# Altium PCB PCB.PcbDoc
Units mil, origin at the board's own origin, x right, y up, seen from the top; angles counter-clockwise.
Board outline 6000 x 4000 mil, 2 copper layers (Top Layer, Bottom Layer); 20 components, 19 nets, 166 pads, 0 vias.
Unrouted connection lines stored in the file: 74.
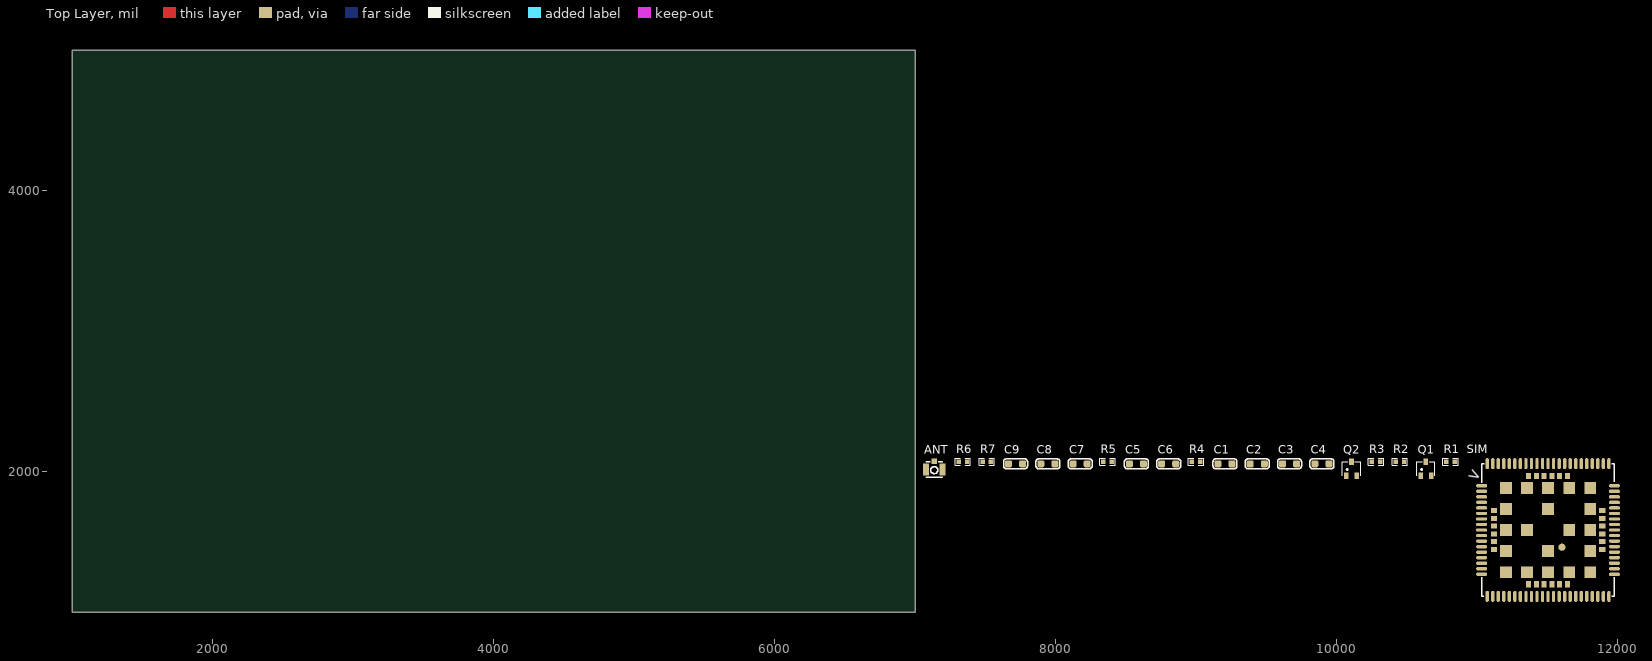
[diagram p0: Top Layer view]
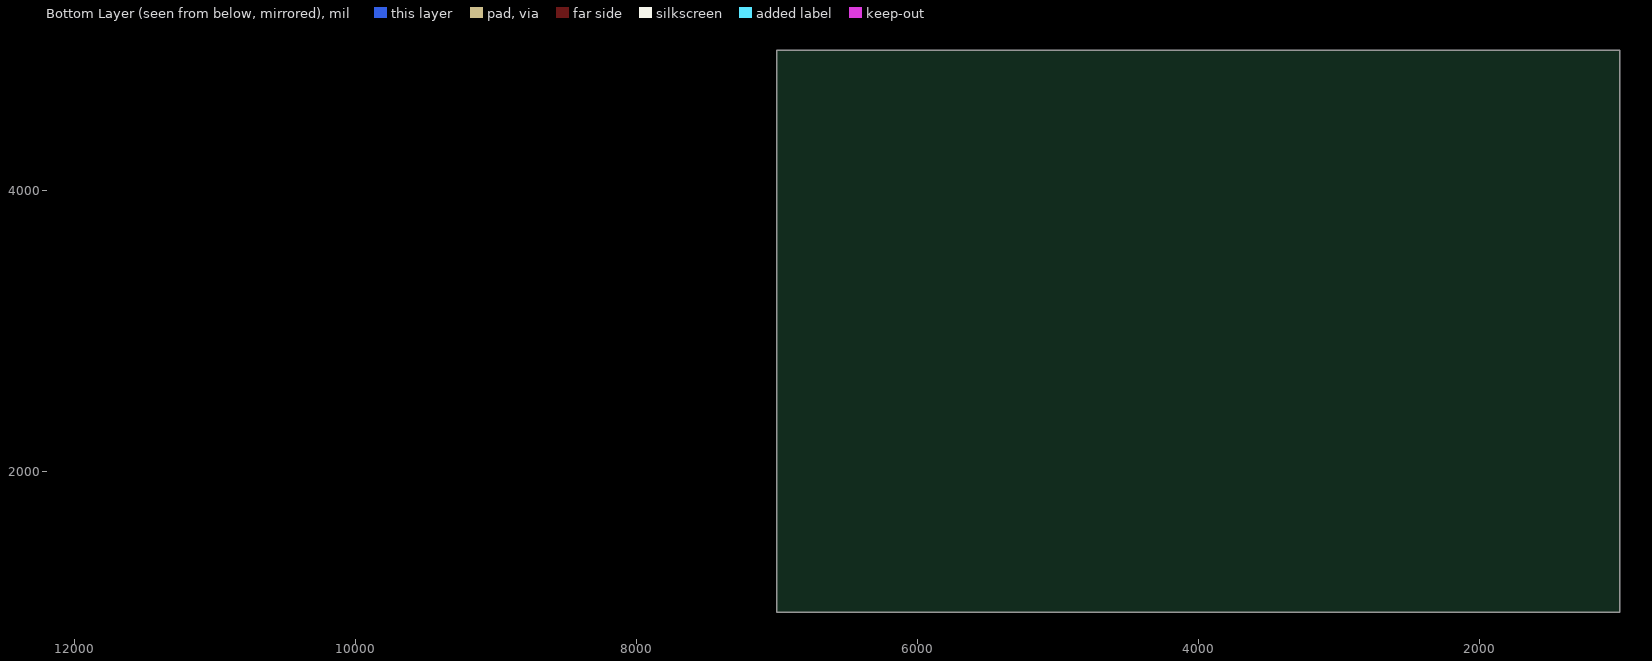
[diagram p1: Bottom Layer view, seen from below]

## Layer stack, top to bottom
Top Solder: solder mask 0.4, Solder Resist, Dk 3.5
Top Layer: signal copper 1.4
Dielectric 1: dielectric 12.6, FR-4, Dk 4.8
Bottom Layer: signal copper 1.4
Bottom Solder: solder mask 0.4, Solder Resist, Dk 3.5

## Board outline
1000,1000 7000,1000 7000,5000 1000,5000

## Design rules (kind name [scope] priority, off if disabled: settings)
Clearance [All] p1: gap=10 ignorepadtopadclearanceinfootprint=FALSE
PolygonConnect [All] p1: connectstyle=Relief reliefconductorwidth=10 reliefentries=4 polygonreliefangle="90 Angle" airgapwidth=10
RoutingVias [All] p1: holewidth=28 width=50 viastyle="Through Hole" minholewidth=28 minwidth=50 maxholewidth=28 maxwidth=50
SolderMaskExpansion [All] p1: expansion=4 istentingtop=FALSE
Width [All] p1: maxlimit=10 minlimit=10 preferedwidth=10
30 further rules are at their usual default settings.

## Components (designator, comment, footprint, x,y, rotation, side; value= is the part's Value field where it differs from the comment)
ANT "ANT" "CONNECTORS RF SMD TYPE IPEX" 7135,2010 r0 top
C1 "10pF" CAP_0805 9205,2055 r0 top
C2 "33pF" CAP_0805 9435,2055 r0 top
C3 "0.1uF" CAP_0805 9665,2055 r0 top
C4 "1uF" CAP_0805 9895,2055 r0 top
C5 "33pF" CAP_0805 8575,2055 r0 top
C6 "100nF" CAP_0805 8805,2055 r0 top
C7 "22pF" CAP_0805 8175,2055 r0 top
C8 "22pF" CAP_0805 7945,2055 r0 top
C9 "22pF" CAP_0805 7715,2055 r0 top
Q1 "2N3904" SOT-23 10635,2020 r0 top value=C9014
Q2 "2N3904" SOT-23 10105,2020 r0 top value=C9014
R1 "4.7k" "RES CHIPS SMD 0603 TYPE 1608" 10810,2070 r0 top
R2 "47k" "RES CHIPS SMD 0603 TYPE 1608" 10450,2070 r0 top
R3 "4.7k" "RES CHIPS SMD 0603 TYPE 1608" 10280,2070 r0 top
R4 "47k" "RES CHIPS SMD 0603 TYPE 1608" 9000,2070 r0 top
R5 "22R" "RES CHIPS SMD 0603 TYPE 1608" 8370,2070 r0 top
R6 "22R" "RES CHIPS SMD 0603 TYPE 1608" 7340,2070 r0 top
R7 "22R" "RES CHIPS SMD 0603 TYPE 1608" 7510,2070 r0 top
SIM "Sim7670G" SIM7670 11505,1580 r0 top

## Footprints (in the part's own frame and the unit in brackets; to place one, negate y for a bottom-side part, rotate by r counter-clockwise, add the part's x,y. Pads: shape width x height; smd on the part's side, far side on the other; paste and mask are expansions set on the pad)
CAP_0805 [mil]
  rrect50% 50x50 smd: 1(-50,0) 2(50,0)
  silkscreen extent -85,-35 85,35, body extent -40,-25 40,25, height 24
"CONNECTORS RF SMD TYPE IPEX" [mm]
  rect 1x1.05 smd: 1(0.024,1.627)
  rect 1.05x2.2 smd: 2(-1.451,0.102) 3(1.499,0.102)
  silkscreen extent -1.45,-1.3 1.47,1.5, body extent -1.45,-1.4 1.55,1.7, height 1.25
"RES CHIPS SMD 0603 TYPE 1608" [mil]
  rect 31.75x34.02 smd: 1(-30,0) 2(29.31,0)
  silkscreen extent -55,-26 54,26, body extent -32,-16 31,16, height 17
SIM7670 [mm]
  oval 2x0.6 smd paste+0.102 mask+0.102: 1(-12.009,8.1) 2(-12.009,7.1) 3(-12.009,6.1) 4(-12.009,5.1) 5(-12.009,4.1) 6(-12.009,3.1) 7(-12.009,2.1) 8(-12.009,1.1) 9(-12.009,0.1) 10(-12.009,-0.9) 11(-12.009,-1.9) 12(-12.009,-2.9) 13(-12.009,-3.9) 14(-12.009,-4.9) 15(-12.009,-5.9) 16(-12.009,-6.9) 17(-12.009,-7.9) 35(11.991,-7.9) 36(11.991,-6.9) 37(11.991,-5.9) 38(11.991,-4.9) 39(11.991,-3.9) 40(11.991,-2.9) 41(11.991,-1.9) 42(11.991,-0.9) 43(11.991,0.1) 44(11.991,1.1) 45(11.991,2.1) 46(11.991,3.1) 47(11.991,4.1) 48(11.991,5.1) 49(11.991,6.1) 50(11.991,7.1) 51(11.991,8.1)
  oval 0.6x2 smd paste+0.102 mask+0.102: 18(-8.009,-11.9) 19(-7.009,-11.9) 20(-6.009,-11.9) 21(-5.009,-11.9) 22(-4.009,-11.9) 23(-3.009,-11.9) 24(-2.009,-11.9) 25(-1.009,-11.9) 26(-0.009,-11.9) 27(0.991,-11.9) 28(1.991,-11.9) 29(2.991,-11.9) 30(3.991,-11.9) 31(4.991,-11.9) 32(5.991,-11.9) 33(6.991,-11.9) 34(7.991,-11.9) 52(7.991,12.1) 53(6.991,12.1) 54(5.991,12.1) 55(4.991,12.1) 56(3.991,12.1) 57(2.991,12.1) 58(1.991,12.1) 59(0.991,12.1) 60(-0.009,12.1) 61(-1.009,12.1) 62(-2.009,12.1) 63(-3.009,12.1) 64(-4.009,12.1) 65(-5.009,12.1) 66(-6.009,12.1) 67(-7.009,12.1) 68(-8.009,12.1) 89(-11.009,-11.9) 90(-10.009,-11.9) 91(-9.009,-11.9) 92(8.991,-11.9) 93(9.991,-11.9) 94(10.991,-11.9) 95(10.991,12.1) 96(9.991,12.1) 97(8.991,12.1) 98(-9.009,12.1) 99(-10.009,12.1) 100(-11.009,12.1)
  rect 2.1x2.1 smd paste+0.102 mask+0.102: 69(-7.609,7.7) 70(-7.609,3.9) 71(-7.609,0.1) 72(-7.609,-3.7) 73(-7.609,-7.5) 74(-3.809,-7.5) 75(-0.009,-7.5) 76(3.791,-7.5) 77(7.591,-7.5) 78(7.591,-3.7) 79(7.591,0.1) 80(7.591,3.9) 81(7.591,7.7) 82(3.791,7.7) 83(-0.009,7.7) 84(-3.809,7.7) 85(-3.809,0.1) 86(-0.009,-3.7) 87(3.791,0.1) 88(-0.009,3.9)
  rect 1.1x0.9 smd paste+0.102 mask+0.102: 101(-9.809,3.6) 102(-9.809,2.2) 103(-9.809,0.8) 104(-9.809,-0.6) 105(-9.809,-2) 106(-9.809,-3.4) 113(9.791,-3.4) 114(9.791,-2) 115(9.791,-0.6) 116(9.791,0.8) 117(9.791,2.2) 118(9.791,3.6)
  rect 0.9x1.1 smd paste+0.102 mask+0.102: 107(-3.509,-9.7) 108(-2.109,-9.7) 109(-0.709,-9.7) 110(0.691,-9.7) 111(2.091,-9.7) 112(3.491,-9.7) 119(3.491,9.9) 120(2.091,9.9) 121(0.691,9.9) 122(-0.709,9.9) 123(-2.109,9.9) 124(-3.509,9.9)
  round 1.3 smd paste+0.102 mask+0.102: ""(2.491,-3)
  silkscreen extent -12.01,-11.9 11.99,12.1
SOT-23 [mm] "SOT 23 _ 1-3-2"
  rect 0.85x1.2 smd: 1(-0.94,-1.245) 2(0.985,-1.25) 3(0.005,1.25)
  silkscreen extent -1.65,-1.27 1.65,1.27, body extent -1.47,-1.33 1.53,1.17, height 1.06

## Part data
ANT: library part "CONNECTORS RF SMD", "SMD RF Connectors / Coaxial Connectors ROHS", BOM_JLCPCB Part Class="Extended Part", BOM_Manufacturer="SHOU HAN(首韩)", BOM_Manufacturer Part="IPEX1-TXZ 142", BOM_Supplier=LCSC, BOM_Supplier Part=C3151745, Contributor=lcsc, link=https://atta.szlcsc.com/upload/public/pdf/source/20220627/A0C2EF411B6F3EC53ED1A4F491E26EB6.pdf, spicePre=U, spiceSymbolName="IPEX1-TXZ 142"
C1 C2 C3 C4 C5 C6 C7 C8 C9: library part CAP104-100nF-50V, "Capacitor", 104=100nF
Q1 Q2: library part "Trans BC817", "SOT-23 - C8658"
R1 R2 R3 R4 R5 R6 R7: library part "RES 0603 1%_", "±1% - Chip Resistor - Surface Mount ROHS", Chung_Loai=Dán, Don_Vi=Con, Ma_Hang=MH005880, So_Chan=2

## Nets (pads, with @x,y where several pads share a name; then routed paths per layer and width w, separated by ;. In a path a pad name is that pad's centre, name@x,y a point inside that pad or via, vN(x,y) a via of type N, cw(c..) or ccw(c..) an arc to the next point about the centre after c; other vN are vias at no path point)
ANT: ANT.1 SIM.60
GND: ANT.2 ANT.3 C1.1 C2.1 C3.1 C4.1 C5.1 C6.1 C7.2 C8.2 C9.2 Q1.2 Q2.2 R2.1 R4.1 SIM.2 SIM.17 SIM.18 SIM.29 SIM.39 SIM.45 SIM.46 SIM.54 SIM.58 SIM.59 SIM.61 SIM.62 SIM.63 SIM.64 SIM.65 SIM.69 SIM.70 SIM.71 SIM.72 SIM.73 SIM.74 SIM.75 SIM.76 SIM.77 SIM.78 SIM.79 SIM.80 SIM.81 SIM.82 SIM.83 SIM.84 SIM.85 SIM.86 SIM.87 SIM.88 SIM.89 SIM.91 SIM.92 SIM.94
IO27_GSM_PWRKEY: R1.2
M2M_RXD: SIM.10
M2M_TXD: SIM.9
NetC7_1: C7.1 R5.2 SIM.31
NetC8_1: C8.1 R7.2 SIM.33
NetC9_1: C9.1 R6.2 SIM.32
NetQ1_1: Q1.1 R1.1 R2.2
NetQ2_1: Q2.1 R3.1 R4.2
PWRKEY: Q1.3 SIM.1
RESET_SIM: Q2.3 SIM.16
Sim_CLK: R6.1
Sim_DATA: R5.1
Sim_RST: R7.1
Sim_VSIM: C5.2 C6.2 SIM.30
VBAT: C1.2 C2.2 C3.2 C4.2 SIM.55 SIM.56 SIM.57
VCC5V: 
xb_Reset: R3.2
pads on no net: SIM. SIM.3 SIM.4 SIM.5 SIM.6 SIM.7 SIM.8 SIM.11 SIM.12 SIM.13 SIM.14 SIM.15 SIM.19 SIM.20 SIM.21 SIM.22 SIM.23 SIM.24 SIM.25 SIM.26 SIM.27 SIM.28 SIM.34 SIM.35 SIM.36 SIM.37 SIM.38 SIM.40 SIM.41 SIM.42 SIM.43 SIM.44 SIM.47 SIM.48 SIM.49 SIM.50 SIM.51 SIM.52 SIM.53 SIM.66 SIM.67 SIM.68 SIM.90 SIM.93 SIM.95 SIM.96 SIM.97 SIM.98 SIM.99 SIM.100 SIM.101 SIM.102 SIM.103 SIM.104 SIM.105 SIM.106 SIM.107 SIM.108 SIM.109 SIM.110 SIM.111 SIM.112 SIM.113 SIM.114 SIM.115 SIM.116 SIM.117 SIM.118 SIM.119 SIM.120 SIM.121 SIM.122 SIM.123 SIM.124

## Text inside footprints (layer, text, board x,y; h text height)
SIM: Top Overlay ">" at 10925.32,1965.01 h80 r331